# Altium PCB tscnew-tr-3-8-asadi.PcbDoc
Units mm, origin at the board's own origin, x right, y up, seen from the top; angles counter-clockwise.
Board outline 151 x 86.38 mm, 2 copper layers (Top Layer, Bottom Layer); 68 components, 62 nets, 217 pads, 0 vias.
Unrouted connection lines stored in the file: 45.
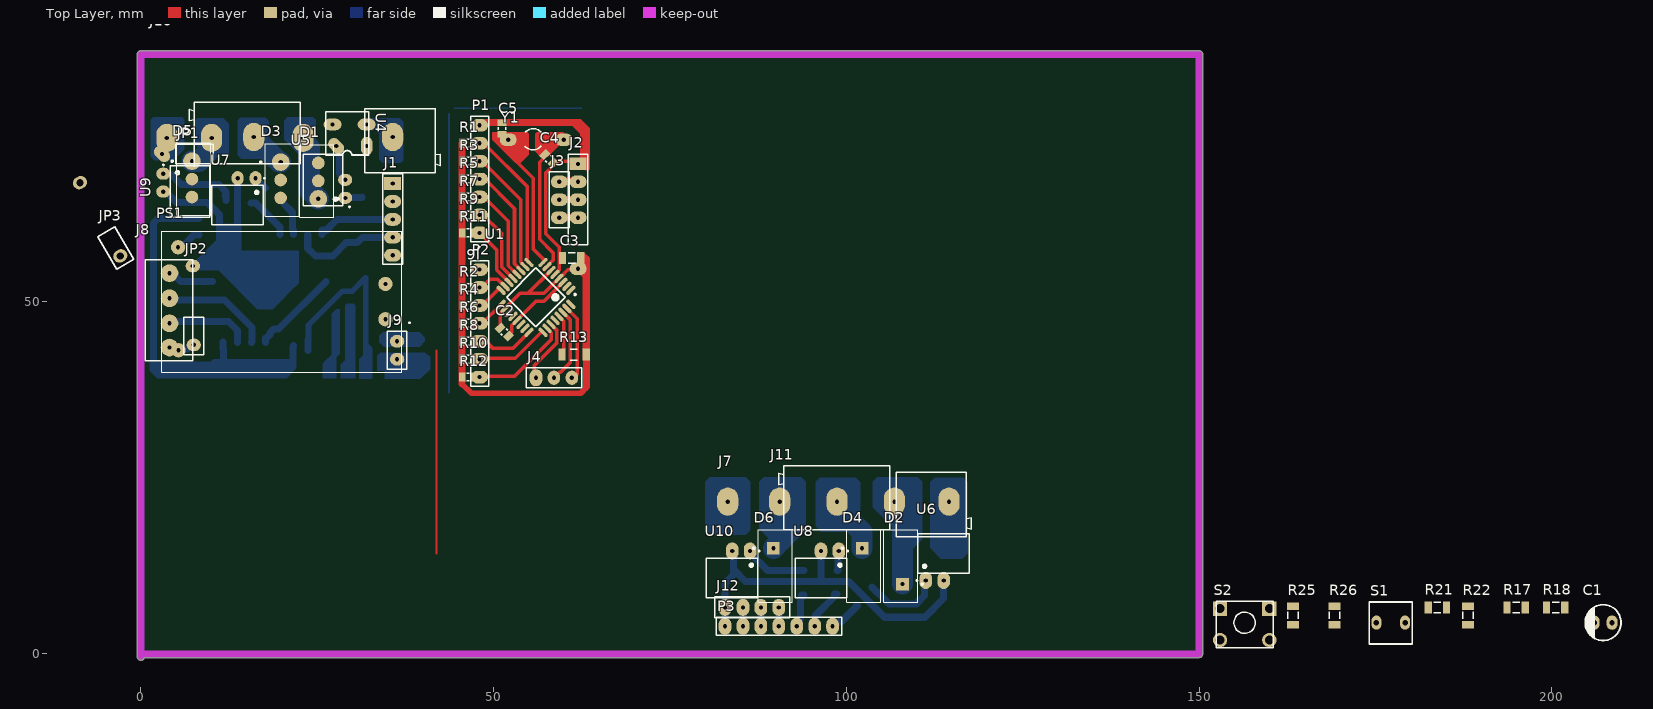
[diagram p0: Top Layer view]
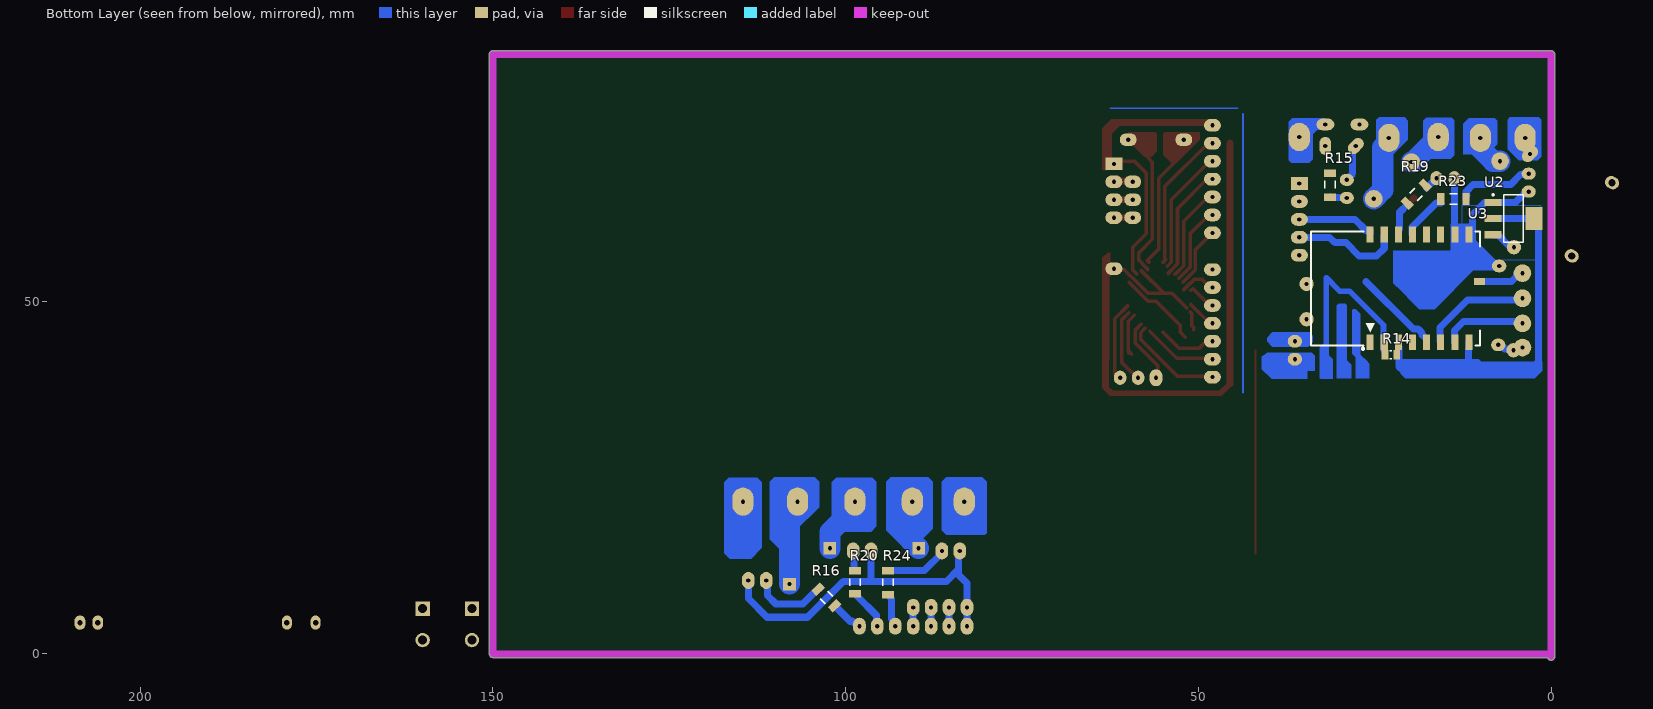
[diagram p1: Bottom Layer view, seen from below]

## Layer stack, top to bottom
Top Solder: solder mask 0.0102, Solder Resist, Dk 3.5
Top Layer: signal copper 0.0356
Dielectric 1: dielectric 0.32, FR-4, Dk 4.8
Bottom Layer: signal copper 0.0356
Bottom Solder: solder mask 0.0102, Solder Resist, Dk 3.5

## Board outline
-0.5,-0.381 -0.5,85 cw(c0,85) 0,85.5 150,85.5 cw(c150,85) 150.5,85 150.5,0 cw(c150,0) 150,-0.5 0.486,-0.5 cw(c0,-0.381)

## Design rules (kind name [scope] priority, off if disabled: settings)
Clearance Clearance_1 [InPolygon] p1: gap=0.8 ignorepadtopadclearanceinfootprint=FALSE
Clearance [All] p2: gap=0.254 ignorepadtopadclearanceinfootprint=FALSE except(0: Arc-Hole Track-Hole SMDPad-Hole THPad-Hole Via-Hole Fill-Hole Poly-Hole Region-Hole Text-Hole)
PolygonConnect [All] p1: connectstyle=Relief reliefconductorwidth=0.254 reliefentries=4 polygonreliefangle="90 Angle" airgapwidth=0.254
RoomDefinition tscnew-tr-3-8 [InComponentClass('tscnew-tr-3-8')] p1: confinementstyle=ConfineIn formatcopy=TRUE lockcomponents=FALSE outline 144.907,-4.953 247.904,-4.953 247.904,23.114 144.907,23.114
RoutingLayers [All] p1: top layer_v5=FALSE bottom layer_v5=TRUE
RoutingVias [All] p1: holewidth=0.711 width=2.5 viastyle="Through Hole" minholewidth=0.711 minwidth=1.27 maxholewidth=0.711 maxwidth=2
SolderMaskExpansion [All] p1: expansion=0.102 istentingtop=FALSE
Width [All] p1: maxlimit=3 minlimit=0.5 preferedwidth=1
29 further rules are at their usual default settings.

## Components (designator, comment, footprint, x,y, rotation, side; value= is the part's Value field where it differs from the comment)
C1 "=Value" ELEC-CAP-RAD10-20 207.264,4.445 r0 top
C2 "=Value" "CAP 0805" 51.562,45.593 r315 top
C3 "=Value" "CAP 1206" 61.087,56.134 r180 top
C4 "=Value" "CAP 0805" 57.785,70.231 r135 top
C5 "=Value" "CAP 0805" 51.181,74.422 r270 top
D1 "BTA16-600CW3G" *TO254P1028X482X1968-3#1 25.146,64.516 r90 top
D2 "BTA16-600CW3G" *TO254P1028X482X1968-3#2 107.95,9.906 r90 top
D3 "BTA16-600CW3G" *TO254P1028X482X1968-3#1 19.812,69.723 r270 top
D4 "BTA16-600CW3G" *TO254P1028X482X1968-3#2 102.235,14.986 r270 top
D5 "BTA16-600CW3G" *TO254P1028X482X1968-3#1 7.239,69.85 r270 top
D6 "BTA16-600CW3G" *TO254P1028X482X1968-3#2 89.662,14.986 r270 top
J1 "Header5X1" "HEADER 5X1"#1 35.687,66.675 r270 top
J2 "Header5X1" "HEADER 5X1"#2 61.976,69.469 r270 top
J3 "Header3X1" "HEADER 3X1"#1 59.309,66.929 r270 top
J4 "Header3X1" "HEADER 3X1"#2 56.007,39.151 r0 top
J6 "TBlock-2" "KF300-2 PIN"#1 39.243,73.279 r270 top
J7 "TBlock-2" "KF300-2 PIN"#2 114.554,21.717 r270 top
J8 "TBlock-4" "KF300-4 PIN" 4.064,41.021 r180 top
J9 "Header2X1" "Header 2X1"#1 36.322,43.053 r90 top
J10 "TBlock-3" "KF300-3 PIN"#1 10.033,73.152 r90 top
J11 "TBlock-3" "KF300-3 PIN"#2 93.599,21.59 r90 top
J12 "Header4X1" "HEADER 4X1" 82.804,6.604 r0 top
JP1 "Jumper" "Header 2X1"#2 7.62,70.866 r180 top
JP2 "Jumper" "Header 2X1"#3 7.493,45.085 r90 top
JP3 "Jumper" "Header 2X1"#4 -3.556,57.531 r120 top
P1 "Header 7" HDR1X7 48.006,74.93 r270 top
P2 "Header 7" HDR1X7 48.006,54.483 r270 top
P3 "Header 7" HDR1X7 82.804,3.937 r0 top
PS1 "HLK-PM01" HLKPM01 34.671,47.451 r180 top
R1 "10K" "RES 0805 (2012X06L)" 46.355,72.39 r180 top
R2 "10K" "RES 0805 (2012X06L)" 46.355,51.943 r180 top
R3 "10K" "RES 0805 (2012X06L)" 46.355,69.85 r180 top
R4 "10K" "RES 0805 (2012X06L)" 46.355,49.403 r180 top
R5 "10K" "RES 0805 (2012X06L)" 46.355,67.31 r180 top
R6 "10K" "RES 0805 (2012X06L)" 46.355,46.863 r180 top
R7 "10K" "RES 0805 (2012X06L)" 46.355,64.77 r180 top
R8 "10K" "RES 0805 (2012X06L)" 46.355,44.323 r180 top
R9 "10K" "RES 0805 (2012X06L)" 46.355,62.23 r180 top
R10 "10K" "RES 0805 (2012X06L)" 46.355,41.783 r180 top
R11 "10K" "RES 0805 (2012X06L)" 46.355,59.69 r180 top
R12 "10K" "RES 0805 (2012X06L)" 46.355,39.243 r180 top
R13 "10K" "RES 1206 (3216X08L)"#1 61.341,42.418 r0 top
R14 "10K" "RES 0805 (2012X06L)" 22.733,42.418 r0 bottom
R15 "10K" "RES 1206 (3216X08L)"#2 31.369,66.548 r270 bottom
R16 "10K" "RES 1206 (3216X08L)"#3 102.743,8.001 r45 bottom
R17 "10K" "RES 1206 (3216X08L)"#4 194.945,6.604 r0 top
R18 "10K" "RES 1206 (3216X08L)"#4 200.533,6.604 r0 top
R19 "10K" "RES 1206 (3216X08L)"#5 19.177,65.151 r135 bottom
R20 "10K" "RES 1206 (3216X08L)"#3 98.679,10.16 r90 bottom
R21 "10K" "RES 1206 (3216X08L)"#4 183.769,6.604 r0 top
R22 "10K" "RES 1206 (3216X08L)"#4 188.087,5.461 r90 top
R23 "10K" "RES 1206 (3216X08L)"#6 13.843,64.516 r180 bottom
R24 "10K" "RES 1206 (3216X08L)"#7 93.98,10.16 r90 bottom
R25 "10K" "RES 1206 (3216X08L)"#4 163.322,5.461 r90 top
R26 "10K" "RES 1206 (3216X08L)"#4 169.164,5.461 r90 top
S1 "PB-2pin" PB-2pin 174.117,1.397 r0 top
S2 "PUSH BUTTON DOUBLE" "PUSH BUTTON" 156.464,4.191 r0 top
U1 "ATmega8-16AC" 32A_N 56.007,50.546 r225 top
U2 "LM1117MP-3.3" MP04A_N 5.334,61.722 r180 bottom
U3 "ESP_12_E" ESP_12_E 25.654,43.811 r90 bottom
U4 "PC817" DIP4 33.062,72.67 r180 top
U5 "K3021P" DIP762W50P254L730H410Q6#1 25.781,67.183 r180 top
U6 "K3021P" DIP762W50P254L730H410Q6#2 113.792,14.224 r90 top
U7 "K3021P" DIP762W50P254L730H410Q6#3 13.716,63.627 r270 top
U8 "K3021P" DIP762W50P254L730H410Q6#2 96.393,10.795 r270 top
U9 "K3021P" DIP762W50P254L730H410Q6#3 6.985,65.532 r0 top
U10 "K3021P" DIP762W50P254L730H410Q6#2 83.82,10.795 r270 top
Y1 "XTAL" R38 55.626,72.898 r90 top

## Footprints (in the part's own frame and the unit in brackets; to place one, negate y for a bottom-side part, rotate by r counter-clockwise, add the part's x,y. Pads: shape width x height; smd on the part's side, far side on the other; paste and mask are expansions set on the pad)
32A_N [mm] "Thin QFP, 32-Leads, Body 7x7mm, Pitch 0.8mm, IPC Medium Density"
  oval 1.65x0.55 smd: 1(-4.2,2.8) 2(-4.2,2) 3(-4.2,1.2) 4(-4.2,0.4) 5(-4.2,-0.4) 6(-4.2,-1.2) 7(-4.2,-2) 8(-4.2,-2.8) 17(4.2,-2.8) 18(4.2,-2) 19(4.2,-1.2) 20(4.2,-0.4) 21(4.2,0.4) 22(4.2,1.2) 23(4.2,2) 24(4.2,2.8)
  oval 0.55x1.65 smd: 9(-2.8,-4.2) 10(-2,-4.2) 11(-1.2,-4.2) 12(-0.4,-4.2) 13(0.4,-4.2) 14(1.2,-4.2) 15(2,-4.2) 16(2.8,-4.2) 25(2.8,4.2) 26(2,4.2) 27(1.2,4.2) 28(0.4,4.2) 29(-0.4,4.2) 30(-1.2,4.2) 31(-2,4.2) 32(-2.8,4.2)
  silkscreen extent -4.32,-2.95 2.95,3.75, body extent -3.5,-3.5 3.5,3.5, height 1.2
*TO254P1028X482X1968-3#1 [mm]
  round 2.5 hole 0.6: 1(0,0)
  round 1.79 smd: 2(2.54,0) 3(5.08,0)
  silkscreen extent -2.6,-2.9 7.68,2.64
*TO254P1028X482X1968-3#2 [mm]
  rect 1.79x1.79 hole 0.6: 1(0,0)
  silkscreen extent -2.6,-2.9 7.68,2.64
"CAP 0805" [mm]
  rect 0.95x1.3 smd: 1(-0.889,0) 2(0.761,0)
  silkscreen extent -0.21,-0.55 0.09,0.55, body extent -1.08,-0.63 0.95,0.63, height 0.65
"CAP 1206" [mm]
  rect 1.05x1.7 smd: 1(-1.27,0) 2(1.326,0)
  silkscreen extent -0.47,-0.75 0.53,0.75, body extent -1.49,-0.77 1.55,0.75, height 0.75
DIP4 [mm]
  oval 1.651x2.54 hole 0.6: 1(1.058,0.661)
  oval 2.54x1.651 hole 0.6: 2(1.058,-2.387) 4(5.884,-2.387)
  oval 2.54x1.651 hole 0.6 rot 135: 3(5.376,0.661)
  silkscreen extent 0.76,-4.19 6.86,1.96, body extent -0.13,-3.56 7.75,1.03, height 4.3
DIP762W50P254L730H410Q6#1 [mm]
  oval 2x1.7 hole 0.6: 1(-3.175,2.54) 2(-3.175,-0.024)
  silkscreen extent -3.9,-3.65 2.8,3.9
DIP762W50P254L730H410Q6#2 [mm]
  oval 2.4x1.8 hole 0.6: 1(-3.81,2.54) 2(-3.81,0)
  silkscreen extent -3.9,-3.65 2.8,3.9
DIP762W50P254L730H410Q6#3 [mm]
  oval 2x1.7 hole 0.6: 1(-3.81,2.54) 2(-3.81,0)
  silkscreen extent -3.9,-3.65 2.8,3.9
ELEC-CAP-RAD10-20 [mil]
  oval 60x80 hole 30: 1(-50,0) 2(50,0)
  silkscreen extent -100,-100 100,100, body extent -124,-124 124,124, height 404
ESP_12_E [mm] "ESP-12 Wi-Fi Module by AI-Thinker"
  rect 2.25x1 smd: 1(0.375,0) 2(0.375,-2) 3(0.375,-4) 4(0.375,-6) 5(0.375,-8) 6(0.375,-10) 7(0.375,-12) 8(0.375,-14) 15(15.625,-14) 16(15.625,-12) 17(15.625,-10) 18(15.625,-8) 19(15.625,-6) 20(15.625,-4) 21(15.625,-2) 22(15.625,0)
  rect 1x1.5 smd: 12(9,-15.5)
  silkscreen extent -0.7,-15.57 16.08,8.37, body extent 0,-15.49 16,8.51, height 2.75
HDR1X7 [mm] "Connector; Header; 7 Position"
  oval 1.8x2.4 hole 0.6: 1(0,0) 2(2.54,0) 3(5.08,0) 4(7.62,0) 5(10.16,0) 6(12.7,0) 7(15.24,0)
  silkscreen extent -1.27,-1.27 16.51,1.27
"Header 2X1"#1 [mil]
  oval 70x80 hole 23.62: 1(-50,0) 2(50,0)
  silkscreen extent -105,-55 105,55, body extent -100,-50 100,50, height 374
"Header 2X1"#2 [mil]
  oval 100x65 hole 23.62 rot 135: 2(181.89,0)
  silkscreen extent -105,-55 105,55, body extent -100,-50 100,50, height 374
"Header 2X1"#3 [mil]
  oval 70x80 hole 23.62: 1(-50,0) 2(390,5)
  silkscreen extent -105,-55 105,55, body extent -100,-50 100,50, height 374
"Header 2X1"#4 [mil]
  oval 70x80 hole 40: 1(-50,0) 2(416.1,-9.29)
  silkscreen extent -105,-55 105,55, body extent -100,-50 100,50, height 374
"HEADER 3X1"#1 [mm]
  oval 1.8x2.4 hole 0.6: 1(0,0) 2(2.54,0) 3(5.08,0)
  silkscreen extent -1.4,-1.4 6.48,1.4, body extent -1.24,-1.27 6.38,1.27, height 8.38
"HEADER 3X1"#2 [mm]
  oval 1.8x2.4 hole 0.6: 1(0,0)
  oval 1.778x2.032 hole 0.6: 2(2.54,0) 3(5.08,0)
  silkscreen extent -1.4,-1.4 6.48,1.4, body extent -1.24,-1.27 6.38,1.27, height 8.38
"HEADER 4X1" [mm]
  oval 1.8x2.4 hole 0.6: 1(0,0) 2(2.54,0) 3(5.08,0) 4(7.62,0)
  silkscreen extent -1.43,-1.5 9.18,1.5, body extent -1.19,-1.22 8.97,1.32, height 8.38
"HEADER 5X1"#1 [mm]
  rect 1.8x2.4 hole 0.6: 1(0,0)
  oval 1.8x2.4 hole 0.6: 2(2.54,0) 3(5.08,0) 4(7.62,0) 5(10.16,0)
  silkscreen extent -1.4,-1.4 11.46,1.4, body extent -1.22,-1.19 11.48,1.35, height 8.38
"HEADER 5X1"#2 [mm]
  rect 1.8x2.4 hole 0.6: 1(0,0)
  oval 1.8x2.4 hole 0.6: 2(2.54,0) 3(5.08,0) 4(7.62,0) 5(14.859,0)
  silkscreen extent -1.4,-1.4 11.46,1.4, body extent -1.22,-1.19 11.48,1.35, height 8.38
HLKPM01 [mil]
  round 80 hole 23.62: 1(0,0) 2(0,-196.85) 3(1155,173.15) 4(1157.48,-401.57)
  silkscreen extent -138,-492 1248,295
"KF300-2 PIN"#1 [mm]
  oval 4x3 hole 0.6: 1(0,-3.543) 2(0.127,-35.56)
  silkscreen extent -4.06,-7.49 5.08,3.18, body extent -3.99,-7.5 5.08,3.24, height 12.52
"KF300-2 PIN"#2 [mm]
  oval 4x3 hole 0.6: 1(0.127,0) 2(0.127,-31.369)
  silkscreen extent -4.06,-7.49 5.08,3.18, body extent -3.99,-7.5 5.08,3.24, height 12.52
"KF300-3 PIN"#1 [mm]
  oval 4x3 hole 0.6: 1(0,0) 2(0.127,-5.967) 3(0,-12.967)
  silkscreen extent -4.06,-12.57 5.08,3.18, body extent -4,-12.57 5.07,3.25, height 12.78
"KF300-3 PIN"#2 [mm]
  oval 4x3 hole 0.6: 1(0,3.048) 2(0,-5.08) 3(0,-13.208)
  silkscreen extent -4.06,-12.57 5.08,3.18, body extent -4,-12.57 5.07,3.25, height 12.78
"KF300-4 PIN" [mm]
  round 2.5 hole 0.6: 1(0,-2.413) 2(0,-5.842) 3(0,-9.398) 4(0,-12.954)
  silkscreen extent -3.3,-14.86 3.43,-0.51, body extent -4.04,-17.65 5.03,3.25, height 12.52
MP04A_N [mm] "SOT223, 4-Leads, Body 6.5x3.5mm, Pitch 2.3mm, Lead Span 7mm, IPC Medium Density"
  rect 2.4x1 smd: 1(-2.9,2.3) 2(-2.9,0) 3(-2.9,-2.3)
  rect 2.4x3.3 smd: 4(2.9,0)
  silkscreen extent -3.03,-3.35 1.4,3.47, body extent -1.85,-3.35 1.85,3.35, height 1.8
PB-2pin [mil] "Switch"
  oval 55.12x78.74 hole 30: 1(40,120) 2(200,120)
  silkscreen extent 0,0 240,235
"PUSH BUTTON" [mil]
  rect 80x80 hole 50: 1(-137.5,87.5) 2(137.5,87.5)
  round 80 hole 50: 3(-137.5,-87.5) 4(137.5,-87.5)
  silkscreen extent -160,-130 160,130, body extent -155,-121 157,123, height 205
R38 [mm] "Crystal, Thru-Hole; 2 Leads; Body 3.1 x 8.2 mm (Dia.xH)"
  oval 1.8x2.4 hole 0.6: 1(0,3.556) 2(0,-4.318)
  silkscreen extent -1.43,-1.18 1.55,1.2
"RES 0805 (2012X06L)" [mm] "Chip Resistor, 2-Leads, Body 2.0x1.3mm, IPC High Density _ (0.100 W)"
  rect 0.95x1.3 smd: 1(-0.838,0) 2(0.812,0)
  silkscreen extent -0.16,-0.55 0.14,0.55, body extent -1.03,-0.63 1,0.64, height 0.6
"RES 1206 (3216X08L)"#1 [mm] "Chip Resistor, 2-Leads, Body 3.2x1.6mm, IPC High Density _ (0.125 W)"
  rect 1.05x1.7 smd: 1(-1.651,0) 2(1.778,0)
  silkscreen extent -0.5,-0.75 0.5,0.75, body extent -1.52,-0.76 1.53,0.76, height 0.6
"RES 1206 (3216X08L)"#2 [mm] "Chip Resistor, 2-Leads, Body 3.2x1.6mm, IPC High Density _ (0.125 W)"
  rect 1.05x1.7 smd: 1(-1.616,0) 2(1.796,0)
  silkscreen extent -0.5,-0.75 0.5,0.75, body extent -1.52,-0.76 1.53,0.76, height 0.6
"RES 1206 (3216X08L)"#3 [mm] "Chip Resistor, 2-Leads, Body 3.2x1.6mm, IPC High Density _ (0.125 W)"
  rect 1.05x1.7 smd: 1(-1.651,0) 2(1.651,0)
  silkscreen extent -0.5,-0.75 0.5,0.75, body extent -1.52,-0.76 1.53,0.76, height 0.6
"RES 1206 (3216X08L)"#4 [mm] "Chip Resistor, 2-Leads, Body 3.2x1.6mm, IPC High Density _ (0.125 W)"
  rect 1.05x1.7 smd: 1(-1.295,0) 2(1.301,0)
  silkscreen extent -0.5,-0.75 0.5,0.75, body extent -1.52,-0.76 1.53,0.76, height 0.6
"RES 1206 (3216X08L)"#5 [mm] "Chip Resistor, 2-Leads, Body 3.2x1.6mm, IPC High Density _ (0.125 W)"
  rect 1.05x1.7 smd: 1(-1.749,0) 2(1.851,0)
  silkscreen extent -0.5,-0.75 0.5,0.75, body extent -1.52,-0.76 1.53,0.76, height 0.6
"RES 1206 (3216X08L)"#6 [mm] "Chip Resistor, 2-Leads, Body 3.2x1.6mm, IPC High Density _ (0.125 W)"
  rect 1.05x1.7 smd: 1(-1.778,0) 2(1.778,0)
  silkscreen extent -0.5,-0.75 0.5,0.75, body extent -1.52,-0.76 1.53,0.76, height 0.6
"RES 1206 (3216X08L)"#7 [mm] "Chip Resistor, 2-Leads, Body 3.2x1.6mm, IPC High Density _ (0.125 W)"
  rect 1.05x1.7 smd: 1(-1.778,0) 2(1.651,0)
  silkscreen extent -0.5,-0.75 0.5,0.75, body extent -1.52,-0.76 1.53,0.76, height 0.6

## Part data
C1: library part "Capacitor Electrolytic", "Electrolytic Capacitor"
C2 C3 C4 C5: library part Capacitor, "Capacitor"
D1 D2 D3 D4 D5 D6: "TRIAC Standard 600V 16A Through Hole TO-220AB", Package="TO-220 ON Semiconductor", Arrow_Americas-Purchase-URL=https://snapeda.com/shop?store=Arrow+Americas&id=390940, Availability=Unavailable, DigiKey-Purchase-URL=https://snapeda.com/shop?store=DigiKey&id=390940, MF="Littelfuse Inc.", Mouser-Purchase-URL=https://snapeda.com/shop?store=Mouser&id=390940, MP=BTA16-600CW3G, Price=None, SnapEDA_Link=https://www.snapeda.com/parts/BTA16-600CW3G/Littelfuse%20Inc./view-part/390940/?ref=snap
P1 P2 P3: "Header, 7-Pin", LatestRevisionDate=17-Jul-2002, LatestRevisionNote="Re-released for DXP Platform.", Publisher="Altium Limited"
PS1: "<b>Ultra-compact power module</b><p> Source: <a href=\"https://datasheet.lcsc.com/szlcsc/1906201102_HI-LINK-HLK-PM03_C209904.pdf\"> Datasheet </a>", Package="Package Analog Devices", Availability=Unavailable, MF=Hi-link, MP=hlk-pm01, Price=None, SnapEDA_Link=https://www.snapeda.com/parts/hlk-pm01/Hi-link/view-part/2875605/?ref=snap
R1 R2 R3 R4 R5 R6 R7 R8 R9 R10 R11 R12 R13 R14 R15 R16 R17 R18 R19 R20 R21 R22 R23 R24 R25 R26: library part Resistor, "Resistor", Power="1/4 W", Tolerance=5%
S1 S2: "Switch"
  S1: Designer="Seyed Mohsen Ghasemian", E-mail=picpars@gmail.com, Publisher=www.picpars.com, WEB=www.picpars.com
U1: "8-Bit AVR Microcontroller with 8K Bytes of In-System Programmable Flash Memory", Supplier Part Number 1=ATMEGA8-16AC-ND, Code_JEDEC=MS-026-ABA, ComponentLink1Description=Datasheet, ComponentLink1URL=http://www.atmel.com/dyn/resources/prod_documents/doc2486.pdf, ComponentLink2Description="Atmel.com Home", ComponentLink2URL=http://www.atmel.com, DatasheetVersion=2486H-AVR-09/02, LatestRevisionDate=16-Oct-2006, LatestRevisionNote="IPC-7351 Footprint Added.", PackageDescription="32-Lead, 7x7x1.0 mm Body, 0.8mm Lead Pitch, Thin Profile Plastic Quad Flat Package (TQFP)", PackageReference=32A, PackageVersion="revB, Oct-2001", Published=17-Sep-2003, Publisher="Altium Limited", Supplier 1=Digi-Key, Supplier 2=Mouser, Supplier Part Number 2=556-ATMEGA8-16AC
U2: "800mA Low-Dropout Linear Regulator", DigiKeyPartNumber=LM1117MP-3.3CT-ND, Manufacturer="National Semiconductor", PackageTopMarking=XYTT*N05A, PowerWise=N, Code_IPC=SOT223-4, Code_JEDEC=TO-261-AA, ComponentLink1Description="LM1117 Datasheet", ComponentLink1URL=http://www.national.com/ds/LM/LM1117.pdf, ComponentLink2Description="LM1117 Web Page", ComponentLink2URL=http://www.national.com/pf/LM/LM1117.html, ComponentLink3Description="MP04A Package Page", ComponentLink3URL=http://www.national.com/packaging/folders/mp04a.html, CompType="LDO IC", DatasheetVersion=Apr-2006, PackageDescription="Molded SOT-223, 6.50 x 3.56 x 1.6mm Body, 4 Lead, 2.3mm Pitch", PackageReference=MP04A, PackageVersion="revB, Apr-2003", PartNumber=LM1117MP-3.3, PinCount=4, Published=4-Dec-2008, Publisher="Altium Limited", RoHS=O
U3: "ESP-12 Wi-Fi Module by AI-Thinker", IC=ESP8266-EX, Vendor=Ai-thinker
U4: library part OPTCOUPLER_01, "4-Pin Phototransistor Optocoupler"
U5 U6 U7 U8 U9 U10: "Optoisolator Triac Output 5300Vrms 1 Channel 6-DIP", Package="DIP-6 Vishay", Availability=Unavailable, DigiKey-Purchase-URL=https://snapeda.com/shop?store=DigiKey&id=291595, MF="Vishay Semiconductor", Mouser-Purchase-URL=https://snapeda.com/shop?store=Mouser&id=291595, MP=K3021P, Price=None, SnapEDA_Link=https://www.snapeda.com/parts/K3021P/Vishay%20Semiconductor%20Opto%20Division/view-part/291595/?ref=snap
Y1: "Crystal Oscillator", LatestRevisionDate=17-Jul-2002, LatestRevisionNote="Re-released for DXP Platform.", PackageDescription="Crystal, Thru-Hole; 2 Leads; Body 3.1 x 8.2 mm (Dia.xH)", PackageReference=R38, Published=8-Jun-2000, Publisher="Altium Limited"

## Nets (pads, with @x,y where several pads share a name; then routed paths per layer and width w, separated by ;. In a path a pad name is that pad's centre, name@x,y a point inside that pad or via, vN(x,y) a via of type N, cw(c..) or ccw(c..) an arc to the next point about the centre after c; other vN are vias at no path point)
adc: J1.2 J2.2 J3.1 J4.1 R14.2 U1.27 U3.2 U4.4 | length 43
  Top Layer w0.5: J4.1@55.753,38.516 J4.1@55.758,38.521 ; J4.1@55.758,38.14 J4.1@55.758,40.008 ; J4.1@55.758,38.735 55.758,40.227 55.753,40.232 55.753,40.894 58.919,44.06 58.919,45.924 58.128,46.714 U1.27
  Top Layer w1: J3.1 59.42,67.04 61.865,67.04 J2.2
  Bottom Layer w0.8: U3.2@23.717,44.545 23.754,44.582 23.754,46.614 28.575,51.435 29.972,51.435 31.877,53.34 31.877,40.513 ; J1.2@35.687,63.754 36.322,63.754 J1.2@36.322,64.516
  Bottom Layer w1: R14.2@23.717,43.043 U3.2@23.717,44.545
btn: S2.2 U3.18
faz: D1.2 D3.2 D5.2 J6.2 JP1.2 PS1.2 R17.2 R18.2 R21.2 R22.2 R25.2 R26.2 U4.1 | length 0.1
  Bottom Layer w0.6: PS1.2 PS1.2@34.747,52.451
GND: C1.2 C2.2 C3.2 C4.1 C5.1 J1.1 J2.1 J8.1 J9.1 J12.1 JP2.1 JP2.2 JP3.1 JP3.2 P1.1 P2.1 P3.1 PS1.3 S1.1 S2.4 U1.3 U1.5 U1.21 U2.1 U3.15 U3.16 U4.3 U5.2 U6.2 U7.2 U8.2 U9.2 U10.2 | length 147.1
  Top Layer w0.5: C2.2@51.846,44.903 52.578,45.635 52.578,46.581 52.892,46.895 52.908,46.895 52.908,46.911 U1.21@53.188,47.191 ; U1.21 56.004,49.977 57.135,49.977 U1.3 ; U1.5@58.709,53.827 59.309,54.427 59.309,57.658 57.388,59.579 57.388,68.183 59.055,69.85 61.595,69.85 J2.1
  Top Layer w1: P1.1 48.522,74.93 48.903,75.311 C5.1 61.341,75.311 62.738,73.914 62.738,70.455 62.676,70.393 62.676,69.869 62.276,69.469 J2.1
  Bottom Layer w1: U9.2 3.514,65.532 5.024,64.022 U2.1 9.384,64.022 11.176,62.23 U3.15@11.176,59.944 ; J8.1 4.191,43.307 5.842,43.307 PS1.3@5.899,43.25 ; PS1.3 5.531,43.25 PS1.3@5.899,43.25 ; JP2.1 7.155,43.815 6.591,43.25 PS1.3@5.899,43.25 ; JP2.2@8.001,54.836 11.26,54.836 13.398,56.974 13.398,57.668 ; 11.717,58.293 U3.15@11.717,59.436 ; 13.43,58.293 U3.16@13.43,59.035 ; U3.16 13.654,60.061 13.716,60.123 U7.2 ; 16.594,55.245 20.8,55.245 ; U4.3 28.125,71.57 28.125,71.11 28.125,68.078 28.956,67.246 U5.2 ; P3.1 J12.1 82.804,10.033 83.973,11.202 83.973,12.039 ; U10.2 83.973,14.452 83.973,12.039 ; U8.2 96.393,10.287 ; U6.2 113.792,7.874 111.125,5.207 105.41,5.207 100.33,10.287 96.393,10.287 ; 83.973,12.039 85.725,10.287 96.393,10.287
i13: U1.2
i14: U1.1
i15: U1.32
i16: U1.28
NetC4_2: C4.2 U1.7 Y1.2 | length 21.4
  Top Layer w0.5: U1.7@57.149,54.486 57.149,54.503 57.912,55.266 57.912,55.309 57.928,55.309 57.977,55.357 57.977,55.374 58.42,55.817 58.42,56.896 56.515,58.801 56.515,69.723 57.247,70.455 C4.2 ; C4.2@57.247,70.896 58.78,72.429 58.823,72.429 59.292,72.898 Y1.2
NetC5_2: C5.2 U1.8 Y1.1 | length 20.1
  Top Layer w0.5: Y1.1 51.522,72.35 51.522,71.541 55.626,67.437 55.626,57.404 57.249,55.781 57.249,55.748 U1.8
NetD1_3: D1.3
NetD2_3: 
NetD3_3: D3.3 | length 0.3
  Top Layer w1: D3.3@19.447,64.643 D3.3@19.661,64.429
NetD4_3: 
NetD5_3: D5.3
NetD6_3: 
NetR15_2: R15.2 U5.1 | length 2.3
  Bottom Layer w1: U5.1@29.21,64.516 29.421,64.727 31.344,64.727 R15.2
NetR16_2: R16.2 U6.1 | length 11.1
  Bottom Layer w1: R16.2@103.658,9.456 104.291,8.823 104.334,8.823 106.045,7.112 109.904,7.112 111.099,8.307 111.099,10.261 U6.1
NetR17_1: R17.1
NetR18_1: R18.1
NetR19_2: R19.2 U7.1 | length 2
  Bottom Layer w1: U7.1 R19.2@17.653,66.04
NetR20_2: R20.2 U8.1 | length 3
  Bottom Layer w1: R20.2 98.781,11.811 98.806,11.836 98.806,14.478 U8.1
NetR21_1: R21.1
NetR22_1: R22.1
NetR23_2: R23.2 U9.1 | length 11.3
  Bottom Layer w1: U9.1 3.309,67.938 4.325,67.938 5.715,66.548 11.049,66.548 12.04,65.557 R23.2@12.04,64.866 ; R23.2@11.938,64.968 R23.2@12.04,64.866 ; R23.2@12.04,64.262 R23.2@12.04,64.866
NetR24_2: R24.2 U10.1 | length 9
  Bottom Layer w1: U10.1 86.36,14.305 88.854,11.811 R24.2
NetR25_1: R25.1
NetR26_1: R26.1
nol: J6.1 J7.1 PS1.1 U4.2 | length 39.5
  Bottom Layer w0.254: 43.688,37.073 43.688,76.573
o1: P1.2 R1.1 U1.9 | length 19.4
  Top Layer w0.5: P1.2@48.768,72.263 54.737,66.294 54.737,56.007 54.638,55.908 54.638,55.875 U1.9
o1esp: R23.1 U3.19 | length 6.6
  Bottom Layer w1: R23.1@15.596,63.912 16.288,63.912 19.717,60.483 U3.19@19.717,59.436
o2: P1.3 R3.1 U1.10 | length 17.8
  Top Layer w0.5: P1.3 48.387,69.85 53.848,64.389 53.848,55.547 U1.10@54.437,54.958
o2esp: R19.1 U3.20 | length 4.9
  Bottom Layer w1: R19.1@20.304,63.77 21.463,62.611 21.463,60.252 21.654,60.061 U3.20
o3: P1.4 R5.1 U1.11 | length 16
  Top Layer w0.5: P1.4@48.514,67.564 52.959,63.119 52.959,55.305 53.871,54.393 53.871,54.35 53.887,54.35 54.3,53.937 U1.11@54.3,53.921
o3esp: R15.1 U3.5 | length 12.6
  Bottom Layer w1: U3.5 17.654,44.811 17.814,44.811 18.4,45.397 18.4,45.623 18.842,46.065 19.533,46.065 26.231,52.763
o4: P1.5 R7.1 U1.12 | length 13.3
  Top Layer w0.5: P1.5@48.387,65.024 52.07,61.341 52.07,55.049 U1.12
o5: P1.6 R9.1 U1.13 | length 11.1
  Top Layer w0.5: P1.6@48.26,62.484 51.181,59.563 51.181,54.806 U1.13
o6: P1.7 R11.1 U1.14 | length 8.8
  Top Layer w0.5: P1.7 50.427,57.269 50.427,54.429 U1.14
o7: P2.2 R2.1 U1.15 | length 5.1
  Top Layer w0.5: P2.2 48.332,51.943 49.475,53.086 50.609,53.086 51.179,52.516 51.195,52.516 51.608,52.103 51.608,52.087 51.624,52.087 52.037,51.674 U1.15@52.037,51.658
o8: P2.3 R4.1 U1.16 | length 4.1
  Top Layer w0.5: P2.3 48.387,49.403 50.772,51.788 50.805,51.788 U1.16
o9: P2.4 R6.1 U1.17 | length 4.2
  Top Layer w0.5: P2.4 48.378,46.863 U1.17@51.057,49.543
o10: P2.5 R8.1 U1.24 | length 8.4
  Top Layer w0.5: P2.5 48.255,44.074 49.144,44.074 49.911,43.307 52.705,43.307 54.58,45.182 54.59,45.182 55.004,45.596 U1.24
o11: P2.6 R10.1 U1.25 | length 10.5
  Top Layer w0.5: P2.6 48.133,41.91 53.086,41.91 U1.25@56.899,45.723
o12: P2.7 R12.1 U1.26 | length 14.2
  Top Layer w0.5: P2.7 48.133,39.37 52.959,39.37 58.165,44.576 58.165,45.546 57.563,46.148 U1.26
oo1: D5.1 D6.1 J10.1 J11.1 | length 13
  Bottom Layer w3: D5.1 8.255,69.85 10.033,71.628 J10.1 ; D6.1 90.805,16.129 90.805,21.598 90.551,21.852 J11.1@90.551,22.352
oo2: D3.1 D4.1 J10.2 J11.2 | length 13.3
  Bottom Layer w3: J10.2@16.58,72.701 19.558,69.723 D3.1 ; J11.2@98.679,22.352 J11.2 98.679,20.828 102.235,17.272 D4.1
oo3: D1.1 D2.1 J10.3 J11.3 | length 22.5
  Bottom Layer w3: J10.3 23,72.652 23.876,71.776 23.876,65.786 D1.1 ; J11.3@106.68,22.098 107.315,22.098 107.95,20.955 D2.1
q1: U1.22
rst: R13.1 S1.2 U1.29 U3.1 | length 6.4
  Top Layer w0.5: U1.29@59.08,48.025 59.944,47.161 59.944,43.057 59.838,42.951 R13.1@59.838,42.637 ; R13.1@59.436,42.489 R13.1@59.838,42.891
"rx at": J1.3 J2.3 J3.2 J4.2 U1.30 U3.22 | length 24.9
  Top Layer w0.5: J4.2@58.42,38.389 J4.2@58.42,38.516 ; J4.2@58.547,38.77 J4.2@58.547,38.932 ; J4.2 59.298,39.902 59.46,39.902 60.833,41.275 60.833,47.404 U1.30@59.868,48.369
  Top Layer w1: J3.2 J2.3
  Bottom Layer w1: U3.22 25.654,60.061 26.279,60.061 27.813,61.595 J1.3
s1: J8.4 U3.12 | length 6.6
  Bottom Layer w1: J8.4 4.47,53.975 5.634,52.811 U3.12
s2: J8.3 U3.6 | length 15.5
  Bottom Layer w1: J8.3@3.959,50.165 11.857,50.165 15.748,46.274 15.748,44.28 U3.6
s3: J8.2 U3.7 | length 11.9
  Bottom Layer w1: J8.2 4.318,47.117 12.446,47.117 13.717,45.846 U3.7@13.717,44.186
tro1: P3.5 R24.1 | length 5.1
  Bottom Layer w1: P3.5 92.964,4.453 93.472,4.961 93.472,7.771 93.63,7.929 93.63,8.357 93.655,8.382 R24.1
tro2: P3.6 R20.1 | length 6.1
  Bottom Layer w1: P3.6 95.657,4.09 95.657,5.487 98.329,8.159 98.329,8.484 98.354,8.509 R20.1
tro3: P3.7 R16.1 | length 4.9
  Bottom Layer w1: P3.7 98.044,4.021 98.414,4.39 98.783,4.39 99.03,4.637 99.344,4.637 101.54,6.834 101.54,6.869 R16.1@101.449,6.961
trs1: J12.2 P3.2 | length 2.7
  Bottom Layer w1: P3.2 J12.2
trs2: J12.3 P3.3 | length 2.7
  Bottom Layer w1: P3.3 J12.3
trs3: J12.4 P3.4 | length 2.7
  Bottom Layer w1: P3.4 J12.4
"tx at": J1.4 J2.4 J3.3 J4.3 U1.31 U3.21 | length 30.3
  Top Layer w0.5: U1.31@60.049,49.332 61.849,47.532 61.849,39.667 J4.3@60.833,38.651 ; J4.3@60.96,38.608 J4.3@60.96,38.905
  Top Layer w1: J3.3 J2.4
  Bottom Layer w1: U3.21 23.654,57.499 24.732,56.421 27.211,56.421 29.091,58.301 30.665,58.301 31.419,59.055 J1.4
vcc: PS1.4 U2.3 | length 3.7
  Bottom Layer w1: PS1.4 5.468,57.848 5.96,57.848 7.534,59.422 U2.3
vesp: C1.1 C2.1 C3.1 J1.5 J2.5 R1.2 R2.2 R3.2 R4.2 R5.2 R6.2 R7.2 R8.2 R9.2 R10.2 R11.2 R12.2 R13.2 R14.1 U1.4 U1.6 U1.18 U2.2 U2.4 U3.3 U3.8 | length 143.6
  Top Layer w0.5: C2.1@50.679,45.968 50.679,46.286 50.927,46.533 50.927,48.26 U1.18@51.181,48.514 ; U1.18 53.744,51.112 54.876,51.112 ; U1.6 54.876,51.112 ; J2.5 61.814,54.448 60.504,54.448 59.688,53.631 59.672,53.631 59.275,53.234 U1.4 U1.4 57.138,51.112 54.876,51.112
  Top Layer w0.8: 45.543,38.277 46.863,36.957 62.357,36.957 63.119,37.719 R13.2
  Top Layer w1: 45.543,38.277 R12.2 R10.2 R8.2 R6.2 R4.2 R2.2 R7.2 R5.2 R1.2 ; J2.5 62.06,54.61 63.119,53.551 R13.2@63.119,42.56
  Bottom Layer w1: U2.2 U2.4 1.778,61.066 1.778,41.48 2.364,40.894 11.684,40.894 ; U3.8 11.654,43.268 11.684,43.238 11.684,40.894 ; 12.065,40.005 11.684,40.005 11.684,40.894 ; 12.192,39.878 19.558,39.878 19.707,40.027 20.85,40.027 21.59,40.767 21.59,42.418 21.59,43.497 21.654,43.561 U3.3@21.654,43.702
pads on no net: J7.2 J9.2 S2.1 S2.3 U1.19 U1.20 U1.23 U3.4 U3.17
copper on no net: | length 46.8
  Top Layer w0.254: 41.91,14.224 41.91,43.053
  Bottom Layer w0.254: 44.45,77.343 62.45,77.343

## Polygon pours and split planes (outlines as drawn)
faz on Bottom Layer "NONET_L02_P003" (solid, shelved, pour order 3): 1.397,63.5 12.7,63.5 12.7,57.277 11.303,55.88 1.524,55.88 1.524,63.627
no net on Bottom Layer "NONET_L02_P001" (solid, pour order 1): 6.985,67.691

## Keep-outs
Keep-Out Layer:
  lines w1: 0,-0.381 0,85 150,85 150,0 0,0

## Other copper
Top Layer:
  region net NetC4_2: 55.88,71.247 55.88,73.724 56.134,73.977 59.88,73.977 60.198,73.66 60.198,73.025 57.658,70.485 56.642,70.485
  region net NetC5_2: 49.911,73.977 49.784,73.85 49.784,72.898 53.086,69.596 53.848,69.596 54.991,70.739 54.991,73.724 54.737,73.977
  region net GND: 62.992,68.58 63.5,68.58 63.627,68.707 63.627,74.549 62.357,75.819 58.801,75.819 58.801,75.692 59.436,75.057 61.595,75.057 62.738,73.914 62.611,73.787 62.611,71.12
  region net vesp: 62.611,41.783 62.738,41.656 62.738,37.338 63.246,37.338 63.627,37.719 63.627,56.134 62.865,56.896 62.484,56.896 62.484,54.102 63.119,53.467 63.119,51.943
Bottom Layer:
  region: 33.147,74.168
  region net nol: 32.004,75.946 36.703,75.946 37.211,75.438 37.211,69.977 36.83,69.596 34.29,69.596 33.782,70.104 33.782,73.66 33.147,74.295 31.623,74.295
  region net "tx at": 28.194,45.212 28.194,48.768 28.067,48.895 27.686,48.895 27.051,48.26 27.051,44.958
  region net "rx at": 28.956,45.085 28.956,49.403 29.21,49.657 30.099,49.657 30.353,49.403 30.353,44.958
  region net adc: 30.988,40.767 30.988,38.989 32.639,38.989 32.766,39.116 32.766,43.434 32.131,44.069 31.623,43.561 31.623,42.418 30.988,41.783
  region net "tx at": 27.686,41.212 27.686,39.116 25.781,39.116 25.781,41.148 26.162,41.529
  region net "rx at": 30.353,40.767 30.353,39.116 28.321,39.116 28.321,41.021 28.956,41.656
  region net "rx at": 28.956,45.593 29.18,45.817 30.129,45.817 30.353,45.593 30.353,40.767 29.845,40.259 29.21,40.259 28.956,40.513
  region net "tx at": 26.162,41.529 27.051,42.418 27.051,45.593 27.305,45.847 27.94,45.847 28.194,45.593 28.194,42.545 27.686,42.037 27.686,40.386 27.178,39.878 26.543,39.878 26.162,40.259
  region net nol: 111.887,24.32 112.522,24.956 116.586,24.956 117.221,24.32 117.221,14.287 116.459,13.525 113.411,13.525 111.887,15.05
  region net oo3: 103.759,24.384 104.394,25.019 110.109,25.019 110.744,24.384 110.744,16.256 109.093,14.605 107.188,14.605 107.188,17.399 103.759,20.828
  region net oo2: 95.631,24.384 96.203,24.956 101.346,24.956 101.981,24.32 101.981,18.098 100.838,16.954 100.457,17.335 96.393,17.335 95.631,18.098
  region net oo1: 87.63,24.384 88.265,25.019 93.599,25.019 94.234,24.384 94.234,17.526 92.075,15.367 90.043,15.367 87.63,17.78
  region: 86.36,24.384 85.725,25.019 80.645,25.019 80.01,24.384 80.01,17.145 80.264,16.891 85.725,16.891 86.36,17.526
  region: 57.023,73.152
  region: 57.023,73.152
  region: 57.023,73.152
  region net GND: 41.021,41.402 41.021,40.386 39.624,38.989 34.544,38.989 34.544,40.513 35.306,41.275
  region net vesp: 1.27,41.402 9.906,41.402 10.287,41.783 21.336,41.783 21.336,39.751 20.701,39.116 2.286,39.116 1.27,40.132
  region net faz: 5.842,76.073 6.182,75.733 6.114,71.519 4.572,69.977 1.905,69.977 1.397,70.485 1.397,75.692 1.778,76.073
  region net GND: 10.898,54.507 16.51,48.895 18.669,48.895 22.098,52.324 19.589,54.833 16.33,54.833
  region net GND: 40.259,42.672 33.909,42.672 33.528,42.291 33.528,40.132 39.751,40.132 41.021,41.402 41.021,42.164
  region: 40.132,42.926
  region: 39.497,45.593 40.259,44.831 40.259,44.323 39.497,43.561 37.719,43.561 34.417,43.561 33.782,44.196 33.782,45.085 34.29,45.593
  region net oo3: 20.778,76.083 24.374,76.083 24.765,75.692 24.765,70.241 22.977,70.241 20.32,72.898 20.32,75.555
  region net oo2: 14.097,76.01 17.716,76.01 18.161,75.565 18.161,70.168 14.224,70.168 13.716,70.675 13.716,75.629
  region net oo1: 7.62,75.565 8.001,75.946 11.684,75.946 12.446,75.184 12.446,70.866 9.017,70.866 7.62,72.263
  region net nol: 43.561,75.819
  pour cut-out: 4.318,76.962
  region net GND: 14.224,57.15 22.352,57.15 22.352,52.578 21.272,51.498 18.288,54.483 6.477,54.483 10.668,58.674 10.668,60.96 14.224,60.96
  region: 19.431,59.309
  region: 20.447,59.309
  region: 30.353,59.055

## Text inside footprints (layer, text, board x,y; h text height)
U3: Mechanical 13 "CUTOUT POLYGON" at 33.02,43.938 h0.25 r270; Mechanical 13 "ANTENNA AREA" at 33.528,43.938 h0.25 r270